# Altium PCB JacdacBreadboardBc30Mount 134 flex-hack.PcbDoc
Units mm, origin at the board's own origin, x right, y up, seen from the top; angles counter-clockwise.
Board outline 7.6 x 16.8 mm, 2 copper layers (Top Layer, Bottom Layer), stack 1.525 mm thick; 1 components, 3 nets, 11 pads, 0 vias.
Unrouted connection lines stored in the file: 2.
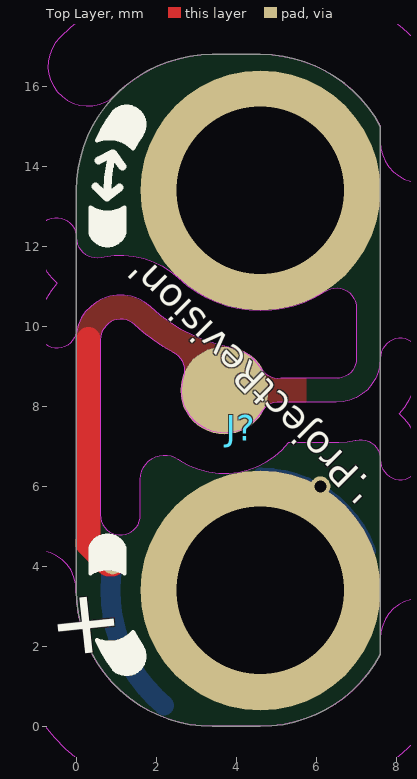
[diagram p0: Top Layer view]
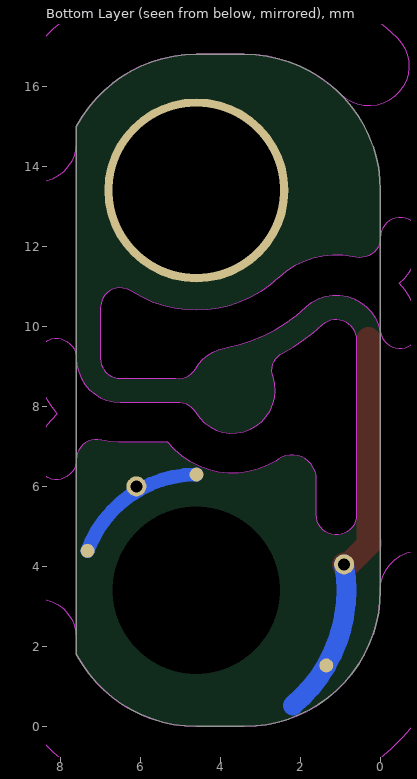
[diagram p1: Bottom Layer view, seen from below]

## Layer stack, top to bottom
Top Solder: solder mask 0.0102, Solder Resist, Dk 3.5
Top Layer: signal copper 0.0356
Dielectric 1: core 1.454, FR-4, Dk 4.2
Bottom Layer: signal copper 0.0356
Bottom Solder: solder mask 0.0102, Solder Resist, Dk 3.5

## Board outline
0,3.4 0,13.4 cw(c3.4,13.4) 3.4,16.8 4.6,16.8 cw(c4.6,13.4) 7.6,15 7.6,1.8 cw(c4.6,3.4) 4.6,0 3.4,0 cw(c3.4,3.4)
cut-out: 0.6,5.285 ccw(c1.1,5.285) 1.6,5.285 1.6,6.179 1.6,6.18 cw(c2.204,6.18) 2.55,6.674 2.62,6.633 ccw(c3.7,8.4) 5.311,7.1 6.53,7.1 6.559,7.1 ccw(c6.5,9.2) 6.97,7.153 6.985,7.156 cw(c7.1,6.67) 7.6,6.67 ccw(c8.1,6.67) 8.6,6.67 ccw(c7.1,6.67) 8.075,7.81 ccw(c6.5,9.2) 8.6,9.2 ccw(c8.1,9.2) 7.6,9.2 cw(c6.5,9.2) 6.5,8.1 5.096,8.1 ccw(c5.052,7.602) 4.621,7.856 cw(c3.7,8.4) 2.685,8.737 ccw(c2.21,8.895) 2.71,8.895 ccw(c2.21,8.895) 2.429,9.345 cw(c4.6,13.4) 1.453,10.046 ccw(c1.11,9.681) 0.74,10.018 ccw(c1.1,9.67) 0.6,9.67
cut-out: -0.419,17.219 ccw(c0.289,16.511) 0.996,15.804 cw(c3.4,13.4) 3.4,16.799 4.6,16.799 cw(c4.6,13.4) 7.6,15 7.6,14.6 ccw(c8.6,14.6) 9.6,14.6 9.6,15 ccw(c8.6,15) 9.483,15.471 ccw(c8.482,15.47) 9.365,15.941 ccw(c4.6,13.4) 4.6,18.8 3.4,18.8 3.397,18.8 ccw(c3.4,13.4)
cut-out: -2,3.397 ccw(c3.4,3.4) 3.396,-2 3.4,-2 4.6,-2 ccw(c4.6,3.4) 9.365,0.859 ccw(c7.6,1.8) 9.6,1.8 9.6,2.2 ccw(c8.6,2.2) 7.6,2.2 7.6,1.8 7.599,1.798 cw(c4.6,3.4) 4.6,0 3.4,0 3.398,0 cw(c3.4,3.4) 0,3.398 ccw(c-1,3.397)
cut-out: -0.982,10.045 cw(c1.1,9.67) -0.476,11.081 cw(c0.5,12.22) -1,12.22 cw(c-0.5,12.22) 0,12.22 ccw(c0.5,12.22) 0.615,11.734 0.694,11.746 cw(c1.1,9.67) 2.541,11.219 2.548,11.212 ccw(c4.6,13.4) 6.202,10.864 cw(c6.5,10.462) 7,10.462 7,9.2 cw(c6.5,9.2) 6.5,8.7 5.115,8.7 cw(c5.053,9.196) 4.622,8.942 ccw(c3.7,8.4) 3.907,9.45 3.813,9.478 cw(c4.6,13.4) 1.857,10.488 1.855,10.49 ccw(c1.1,9.67) 0.003,9.867 cw(c-0.489,9.956)

## Design rules (kind name [scope] priority, off if disabled: settings)
AssemblyTestPointUsage [All] p1: valid=2
BoardOutlineClearance [All] p1: gap=0 ignorepadtopadclearanceinfootprint=FALSE except(0.2: Region-CavityEdge Region-SplitBarrior Text-CavityEdge Text-SplitBarrior; 0.3: Arc-CavityEdge Arc-SplitBarrior Track-CavityEdge Track-SplitBarrior SMDPad-CavityEdge SMDPad-SplitBarrior THPad-CavityEdge THPad-SplitBarrior Via-CavityEdge Via-SplitBarrior Fill-CavityEdge Fill-SplitBarrior Poly-CavityEdge Poly-SplitBarrior)
Clearance [All] p1: gap=0.13 ignorepadtopadclearanceinfootprint=FALSE except(0: Fill-Region Fill-Hole Poly-Region Poly-Hole Region-Hole)
ComponentClearance MH5.0KeepoutaAreaClearance [InComponent('MH1') or InComponent('MH2')  or InComponent('MH3') or InComponent('MH4') vs InComponent('D6') or InComponent('D7') or InComponent('D8') or InComponent('D9') or InComponent('D10') or InComponent('D11') or InComponent('D12') or InComponent('D13') or InComponent('C6') or InComponent('C7') or InComponent('C8')  or  InComponent('C9') or  InComponent('C12')] p1: gap=0 collisioncheckmode=3 verticalgap=0 showdistances=FALSE
ComponentClearance [All] p2: gap=0.2 collisioncheckmode=3 verticalgap=0.2 showdistances=FALSE
DiffPairsRouting [All] p1: maxlimit=2 minlimit=0.15 mostfreqgap=0.15 toplayer_minwidth=0.15 toplayer_maxwidth=2 toplayer_prefwidth=0.15 bottomlayer_minwidth=0.15 bottomlayer_maxwidth=2 bottomlayer_prefwidth=0.15 maxuncoupledlength=25
FabricationTestPointUsage [All] p1: valid=2 allowmultiple=FALSE
HoleSize [All] p1: absolutevalues=TRUE maxlimit=5 minlimit=0.15 maxpercent=80.000 minpercent=20.000
HoleToHoleClearance [All] p1: gap=0.2 allowstackedmicrovias=TRUE
MinimumSolderMaskSliver [All] p1: minsoldermaskwidth=0.005
PlaneClearance [All] p1: clearance=0.2
PlaneConnect [All] p1: planeconnectstyle=Relief reliefexpansion=0.5 reliefentries=4 reliefconductorwidth=0.2 reliefairgap=0.3
PolygonConnect [All] p1: connectstyle=Direct reliefconductorwidth=0.2 reliefentries=4 polygonreliefangle="90 Angle" airgapwidth=0.2
RoutingVias RoutingVias_Power [InNetClass('Power')] p1: holewidth=0.4 width=0.8 viastyle="Through Hole" minholewidth=0.3 minwidth=0.6 maxholewidth=0.4 maxwidth=1
RoutingVias [All] p2: holewidth=0.3 width=0.6 viastyle="Through Hole" minholewidth=0.3 minwidth=0.6 maxholewidth=0.3 maxwidth=0.8
SilkToSilkClearance [All] p1: silktosilkclearance=0.001
SilkToSolderMaskClearance [IsPad] p1: minsilkscreentomaskgap=0.05 clearancetoexposedcopper=TRUE
SolderMaskExpansion [All] p1: expansion=0.075 istentingtop=FALSE
UnRoutedNet [All] p1: checkbadconnections=TRUE
ViasUnderSMD [not ( HasFootprint('JACDAC_EDGE_CONNECTOR_NO_TRACES') or HasFootprint('JACDAC_EDGE_CONNECTOR_NO_TRACES_CABLE_GUIDE') )] p1: allowed=FALSE
Width Width_Power [InNetClass('Power')] p1: maxlimit=1 minlimit=0.2 preferedwidth=0.5
Width [All] p2: maxlimit=1 minlimit=0.13 preferedwidth=0.13 minimp=50.000000 maximp=50.000000 favimp=50.000000
18 further rules are at their usual default settings.

## Components (designator, comment, footprint, x,y, rotation, side; value= is the part's Value field where it differs from the comment)
J? "Jacdac breadboard double washer all signals" Jacdac_breadboard_transition_hole_rings_BC30_bushes 3.7,8.4 r0 top

## Footprints (in the part's own frame and the unit in brackets; to place one, negate y for a bottom-side part, rotate by r counter-clockwise, add the part's x,y. Pads: shape width x height; smd on the part's side, far side on the other; paste and mask are expansions set on the pad)
Jacdac_breadboard_transition_hole_rings_BC30_bushes [mm]
  round 2.2 smd mask+1: 1(0,0)
  rrect78% 4.3x0.9 on Mech1 paste-1 mask+0: 1(0.25,1.27)
  round 6 / inner round 0 / far side round 4.6 hole 4.19 mask+0: 1(0.9,5)
  round 0.5 hole 0.3 mask+0: 2(-2.793,-4.349) 3(2.4,-2.4)
  round 0.35 smd far side paste-1 mask+0: 2(-2.348,-6.875) 3(0.9,-2.105) 3(3.62,-4.01)
  rrect78% 4.8x0.9 on Mech1 paste-1 mask+0: 2(0,0) 3(0,-1.27)
  round 6 / inner round 0 / far side round 0 hole 4.19 unplated mask+0: 3(0.9,-5)
  Bottom Layer lines w0.35: 0.9,-2.105 cw(c0.9,-5) 3.62,-4.01
  Bottom Layer lines w0.5: -2.793,-4.349 ccw(c0.9,-5) -1.51,-7.873
  silkscreen extent -3.35,-7.1 -2,7.1, body extent -1.88,-7.78 3.68,7.78, height 4

## Part data
J?: Hole Clearance=7.0mm, Hole Size=M3

## Nets (pads, with @x,y where several pads share a name; then routed paths per layer and width w, separated by ;. In a path a pad name is that pad's centre, name@x,y a point inside that pad or via, vN(x,y) a via of type N, cw(c..) or ccw(c..) an arc to the next point about the centre after c; other vN are vias at no path point)
GND: J?.1@3.7,8.4 J?.2@0.907,4.051 J?.2@1.352,1.525 | length 6
  Top Layer w0.6: 0.259,4.589 0.796,4.051 J?.2@0.907,4.051 ; 0.3,4.589 0.3,9.681
JD_DATA: J?.1@4.6,13.4
JD_PWR: J?.3@4.6,3.4 J?.3@4.6,6.295 J?.3@6.1,6 J?.3@7.32,4.39
pads on no net: J?.1@3.95,9.67 J?.2@3.7,8.4 J?.3@3.7,7.13

## Polygon pours and split planes (outlines as drawn)
GND on Top Layer "NONET_L-01_P-001" (solid, pour order 0): 0,10.852 1.612,10.852 5.749,9.301 5.749,7.664 0,8.4

## Silkscreen, mask and mechanical layers (free items; w line width, h text height)
Top Overlay:
  text "'.ProjectRevision'" at 7.524,5.986 h0.7 r135
Alignment:
  the board outline again, w0.1
Board Outline:
  lines w1: -0.5,12.22 ccw(c0.5,12.22) 0.731,11.247 ; -0.489,9.956 cw(c1.1,9.67) 2.2,10.852 ccw(c4.6,13.4) 6.5,10.461 ; 1.1,5.285 1.1,9.67 ; 1.1,6.18 cw(c2.204,6.18) 2.837,7.084 ; 1.11,9.681 ccw(c4.6,13.4) 2.208,8.896 ; 2.21,8.895 ccw(c3.7,8.4) 5.052,7.602 ; 4.003,9.941 cw(c3.7,8.4) 5.053,9.196 ; 5.055,7.6 6.53,7.6 ; 5.06,9.2 6.5,9.2 6.5,10.462 ; 6.5,7.6 ccw(c6.5,9.2) 8.1,9.2 ; 6.869,7.643 cw(c7.1,6.67) 8.1,6.67
  lines w2: -1,3.397 ccw(c3.4,3.4) 3.397,-1 ; 0.289,16.511 cw(c3.4,13.4) 3.4,17.8 4.6,17.8 cw(c4.6,13.4) 8.482,15.47 ; 8.6,2.2 8.6,1.8 ; 8.6,14.6 8.6,15 ; 3.397,-1 ccw(c3.4,3.4) 3.4,-1 ; 3.397,-1 ccw(c3.4,0) 3.4,-1 ; 3.4,-1 4.6,-1 ccw(c4.6,3.4) 8.482,1.329 ; 8.482,1.329 ccw(c7.6,1.8) 8.6,1.8 ; 8.482,1.329 ccw(c7.6,1.8) 8.6,1.8

## Text inside footprints (layer, text, board x,y; h text height)
J?: Top Overlay "+" at 1.381,3.59 h2.8 r96